# Altium PCB IndAlarmIf1All.PcbDoc (part 2 of 2)
Units mil, origin at the board's own origin, x right, y up, seen from the top; angles counter-clockwise.
Board outline 6985 x 3980 mil, 2 copper layers (Top Layer, Bottom Layer); 123 components, 78 nets, 575 pads, 160 vias.
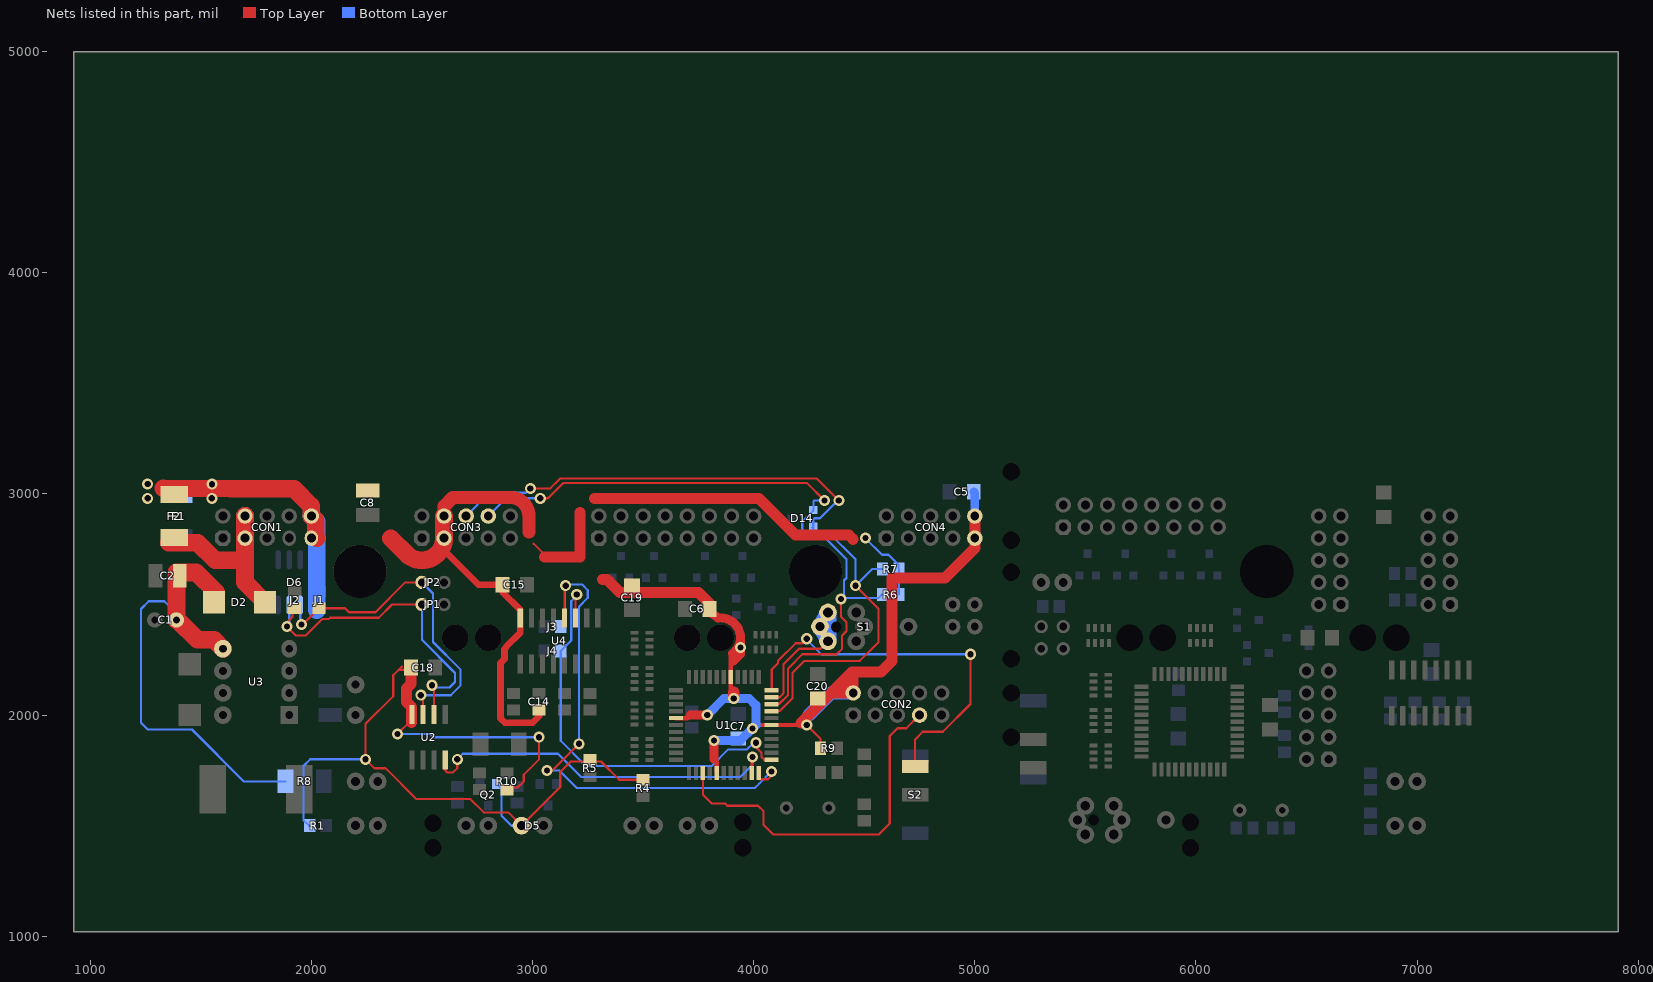
[diagram p2: the nets of this part, all layers, seen from the top]

## Via types
v1: diameter 50, hole 28, Top Layer to Bottom Layer, 160 vias

## Nets (pads, with @x,y where several pads share a name; then routed paths per layer and width w, separated by ;. In a path a pad name is that pad's centre, name@x,y a point inside that pad or via, vN(x,y) a via of type N, cw(c..) or ccw(c..) an arc to the next point about the centre after c; other vN are vias at no path point) (continued)
RXD2: J3.2 U1.11 U4.12 | length 2528.4
  Top Layer w10: v1(3065,1750) 3090,1750 v1(3210,1870) ; U4.12@3145,2443.35 v1@3145,2580 ; U1.11@4022.48,1738.46 4022.48,1717.52 4030,1710 4065,1710 4080,1725 v1(4080,1745)
  Bottom Layer w10: v1(3065,1750) 3120,1750 3200,1670 4005,1670 4025,1690 v1(4080,1745) ; J3.2@3147.4,2400 3147.4,2582.4 v1(3150,2585) 3155,2590 3225,2590 3250,2565 3250,2530 3210,2490 v1(3210,1870)
S1: S1.0 S1.1 U1.21 | length 981.6
  Top Layer w10: U1.21@4081.54,2080.98 4117.7,2080.98 4135,2098.28 4135,2230 4205,2300 4302,2300 S1.1@4336,2334
  Bottom Layer w10: S1.1@4335,2335 S1.1@4336,2334
  Bottom Layer w20: S1.1@4280,2385 S1.1@4320,2315 ; S1.1@4280,2415 S1.1@4316,2478.92 ; S1.1@4336,2334 S1.1@4336,2463.92 ; S1.1@4350,2334 S1.1@4350,2463.92 ; S1.1@4365,2339 S1.1@4365,2468.92
S2: S2.2 U1.22 | length 1751
  Top Layer w10: U1.22@4081.54,2112.48 4081.54,2206.54 4110,2235 4110,2245 4190,2325 4220,2325 v1(4240,2345) ; S2.2@4730,1767.95 4730,1890 4765,1925 4855,1925 4980,2050 v1(4980,2275)
  Bottom Layer w10: v1(4240,2345) 4240,2340 4305,2275 v1(4980,2275)
SCK: CON2.7 U1.3 | length 1644
  Top Layer w10: U1.3@3770.51,1738.46 3770.51,1704.49 3770.51,1697.77 3770.51,1639.49 3810,1600 3870,1600 3880,1590 4020,1590 4045,1565 4045,1503.28 4088.28,1460 4565,1460 4615,1510 4615,1905 4650,1940 4690,1940 CON2.7@4750,2000
SCL: CON3.6 D14.2 R7.1 U1.19 | length 3539.4
  Top Layer w10: v1(2990,3025) 3080,3025 3125,3070 4095,3070 4285,3070 v1(4385,2970) ; U1.19@4081.54,2017.99 4117.99,2017.99 4175,2075 4175,2190 4230,2245 4480,2245 4565,2330 4565,2480 v1(4460,2585)
  Bottom Layer w10: CON3.6@2700,2900 2805,3005 2970,3005 v1(2990,3025) ; D14.2@4265,2848.39 D14.2@4269.21,2852.6 ; D14.2@4269.21,2850.79 D14.2@4269.21,2852.6 ; D14.2@4269.21,2854.21 D14.2@4269.21,2852.6 ; v1@4385,2955 v1(4385,2970) ; v1@4400,2955 v1(4385,2970) ; R7.1@4582.6,2660 4535,2660 v1(4460,2585) 4460,2700 4460,2705 4340,2825 4280,2825 4269.21,2835.79 4269.21,2884.21 4275,2890 4300,2890 4380,2970 v1(4385,2970)
SDA: CON3.8 D14.1 R6.1 U1.20 | length 3219
  Top Layer w10: v1(3035,2980) 3070,2980 3140,3050 4080,3050 4240,3050 v1(4320,2970) ; U1.20@4081.54,2049.49 4115,2050 4155,2090 4155,2210 4220,2275 4375,2275 4400,2300 4400,2360 4420,2380 4420,2420 4395,2445 v1(4395,2525) v1@4391.55,2521.55
  Bottom Layer w10: CON3.8@2800,2900 2880,2980 v1(3035,2980) ; v1(4320,2970) 4275,2970 4270,2965 4270,2928.19 D14.1@4269.21,2927.4 4269.21,2924.21 4220,2875 4220,2825 4245,2800 4325,2800 4420,2705 4420,2620 4408.45,2608.45 4408.45,2538.45 v1(4395,2525) ; v1@4405,2535 v1(4395,2525) ; R6.1@4582.6,2545 4580,2545 4565,2530 4400,2530 v1(4395,2525)
TXD: U1.10 U2.4 | length 1690.9
  Top Layer w10: U2.4@2605,1797.64 2605,1750 2615,1740 2640,1740 2660,1760 v1(2660,1800) ; U1.10@3990.98,1738.46 3990.98,1800.98 v1@4010,1820
  Bottom Layer w10: v1(2660,1800) 2685,1825 3115.36,1825 3220.36,1720 3939.64,1720 3995,1775.36 v1(3995,1810)
TXD2: J4.2 U1.12 U4.11 | length 1911.3
  Top Layer w10: U4.11@3195,2443.35 v1@3195,2540 ; v1@4005,1860 4035,1830 4035,1810 4047.48,1797.52 U1.12@4081.54,1797.52 U1.12@4087.48,1797.52 ; v1@4010,1855 v1(4010,1875)
  Bottom Layer w10: v1(3200,2545) 3200,2540 3175,2515 3175,2337.6 J4.2@3127.4,2290 3127.4,1883.66 3241.07,1770 3810,1770 3885,1845 3970,1845 v1@4000,1875 ; v1@4000,1875 v1(4010,1875) v1@4000,1875
U+: C1.1 C2.2 D2.2 R8.2 U3.5 | length 2246.6
  Top Layer w80: D2.2@1570,2510 1570,2555 1480,2645 1390,2645 C1.1@1390,2430 1395,2430 1485,2340 1560,2340 U3.5@1600,2300
  Bottom Layer w10: C1.1@1390,2430 1390,2460 1335,2515 1265,2515 1230,2480 1230,1965 1260,1935 1460,1935 1695,1700 R8.2@1883.39,1700
UIN: CON1.3 CON1.4 D2.1 F2.1 | length 904.6
  Top Layer w80: F2.1@1355,2780 1487.05,2777.95 1565,2700 1700,2700 ; CON1.4@1700,2900 1700,2600 D2.1@1790,2510
  Bottom Layer w80: CON1.3@1700,2800 CON1.4@1700,2900
VCC: C5.2 C6.2 C7.2 C8.2 C14.1 C15.2 C18.2 C19.2 C20.2 CON1.9 CON1.10 CON2.2 CON3.3 CON3.4 CON4.9 CON4.10 D5.1 D6.1 D6.8 F1.1 F2.2 Q2.2 R1.2 R4.2 R5.2 R6.2 R7.2 R9.1 R10.1 U1.5 U1.17 U1.27 U1.38 U2.8 U4.16 | length 14799
  Top Layer w10: v1(2390,1915) U2.8@2445,1970 ; 2395,2205 C18.2@2455,2205 ; 2408.68,2218.62 2370,2179.94 2370,2085.15 2245,1960.15 v1(2245,1800) 2285,1760 2335,1760 2345,1750 2465,1630 2475,1620 2720,1620 2780,1560 2890,1560 D5.1@2950,1500 3125,1675 3125,1725 3125,1742.57 3172.43,1790 3310,1790 3392.6,1707.4 R4.2@3500,1707.4 ; R10.1@2885,1672.6 2932.6,1672.6 2960,1700 2960,1730 3030,1800 v1(3030,1900) ; 3005,2775 3055,2725 ; v1(4240,1955) 4302.6,1892.4 R9.1@4302.6,1850
  Top Layer w20: C15.2@2864.88,2555.12 C15.2@2864.88,2590 ; U1.38@3648.46,1986.5 3701.5,1986.5 3715,2000 ; 3820,1800 3833.5,1786.5 U1.5@3833.5,1738.46 ; 3896.5,2280 3896.5,2226.5 ; 3910,2105 3896.5,2118.5 U1.27@3896.5,2171.54 3896.5,2226.5 ; 3910,2245 3905,2235 3896.5,2226.5 ; 4040,1955 U1.17@4081.54,1955 v1(4240,1955) 4215,1965
  Top Layer w30: CON3.3@2600,2800 2600,2745 2755,2590 C15.2@2864.88,2590 ; C15.2@2864.88,2555.12 2945,2475 2945,2443.35 2945,2385 2945,2373.09 2879.24,2307.32 2879.24,2303.74 2873.35,2297.84 2873.35,2253.35 2855,2235 2855,1985 2875,1965 3000,1965 3030,1995 C14.1@3030,2022.6
  Top Layer w40: 3715,2000 v1(3790,2000) ; C6.2@3795,2470 3839.48,2439.38 cw(c3850,2350) 3904.87,2278.66 ; 3820,1800 v1(3820,1885) ; 3910,2245 3940,2275 3940,2360
  Top Layer w50: C18.2@2449.88,2215 2449.88,2139.88 2430,2120 2430,2060 2453.19,2036.81 U2.8@2453.19,1966.81 ; 3055,2715 3215,2715 3215,2915 ; 3280,2980 3321.57,2980 4025,2980 4190,2815 4430,2815 4450,2795 ; 3316.6,2612.66 3317.34,2612.66 3337.34,2612.66 ; 3345,2605 3337.34,2612.66 ; C6.2@3800.12,2480 3800.12,2504.88 3750,2555 3730,2555 3395,2555 3337.34,2612.66 ; v1(3910,2075) 3910,2105 ; 4215,1965 4350,2100 ; 4395,2145 4445,2195 4575,2195 4625,2245 4625,2620 4865,2620 5000,2755 CON4.10@5000,2900 ; 4415,2140 4450,2105 CON2.2@4450,2100 ; 4350,2100 4420,2170 4450,2170 CON2.2@4450,2100 ; 4350,2100 CON2.2@4450,2100
  Top Layer w60: 2355,2800 2358.69,2800 ; CON3.4@2600,2900 2600,2945 2638.82,2983.82 2900,2983.82 cw(c2900,2900) 2983.82,2900 2983.82,2829.32
  Top Layer w80: F2.2@1330,3025 1922.95,3022.05 2000,2945 CON1.10@2000,2900 2020,2880 2020,2805 CON1.9@2025,2800 ; 2358.69,2800 2432.17,2726.52 ccw(c2500,2800) CON3.3@2600,2800 CON3.4@2600,2900
  Bottom Layer w10: R1.2@1992.6,1500 1990,1500 1965,1525 1965,1770 1995,1800 v1(2245,1800) ; v1(2390,1915) 2535,1915 2550,1900 v1(3030,1900) ; Q2.2@2849.21,1677.4 Q2.2@2837.4,1689.21 2860,1666.61 2860,1545 2905,1500 D5.1@2950,1500 ; v1(3995,1940) v1@4010,1955 ; v1(4505,2800) 4580,2725 4610,2725 4655,2680 4655,2662.4 R7.2@4657.4,2660 R6.2@4657.4,2545
  Bottom Layer w20: v1@3810,1895 v1(3820,1885) ; v1(3995,1940) 4010,1955 v1(4240,1955)
  Bottom Layer w40: v1(3790,2000) 3865,2075 v1(3910,2075) 3980,2075 4010,2045 v1@4010,1955 ; v1(3820,1885) 3940,1885 v1(3995,1940) ; C5.2@4995.12,3010 5000,3005.12 CON4.9@5000,2800
  Bottom Layer w60: 4250,2000 4350,2100 CON2.2@4450,2100
  Bottom Layer w80: CON1.10@2000,2900 2025,2875 2025,2475
  other v1: 3940,2305 1260,2980 1550,2980 1550.48,3043.89 1260,3045
XA: D6.3 J2.2 JP1.2 U2.6 | length 1579.5
  Top Layer w10: J2.2@1925,2482.6 1915,2472.6 1915,2445 1890,2420 v1(1890,2400) 1930,2360 1975,2360 2050,2435 2080,2435 2085,2440 2305,2440 2365,2500 JP1.2@2500,2500 ; v1(2545,2135) 2555,2125 U2.6@2555,2002.36
  Bottom Layer w10: v1(1890,2400) 1900,2410 D6.3@1900,2497.64 D6.3@1900,2470 ; JP1.2@2500,2500 2500,2360 2500,2340 2650,2190 2650,2150 2625,2125 2555,2125 v1(2545,2135)
XB: D6.2 J1.2 JP2.1 U2.7 | length 1590.1
  Top Layer w10: v1@1955,2400 1955,2402.6 J1.2@2035,2482.6 2152.4,2482.6 2170,2465 2290,2465 2425,2600 JP2.1@2500,2600 ; U2.7@2505,2002.36 v1@2505,2080
  Bottom Layer w10: D6.2@1950,2465 D6.2@1950,2497.64 1950,2405 v1@1955,2400 ; v1(2495,2090) 2630,2090 2675,2135 2675,2205 2550,2330 2550,2360.36 2550,2550 JP2.1@2500,2600
  other v1: 1955,2410
pads on no net: C25.1 C25.2 C26.1 C26.2 C27.1 C27.2 C29.1 C29.2 C30.1 C30.2 C31.1 C31.2 C32.1 C32.2 C33.1 C33.2 C34.1 C34.2 C36.1 C36.2 C37.1 C37.2 C39.1 C39.2 C40.1 C40.2 CON2.3 CON12.1 CON12.2 CON12.3 CON12.4 CON12.5 CON12.6 CON12.7 CON12.8 CON12.9 CON12.10 CON13.1 CON13.2 CON13.3 CON13.4 CON13.5 CON13.6 CON13.7 CON13.8 CON13.9 CON13.10 CON14.1 CON14.2 CON14.3 CON14.4 CON14.5 CON14.6 CON14.7 CON14.8 CON14.9 CON14.10 CON15.1 CON15.2 CON15.3 CON15.4 CON15.5 CON15.6 CON15.7 CON15.8 CON15.9 CON15.10 CON15.11 CON15.12 CON15.13 CON15.14 CON15.15 CON15.16 D23.1 D23.2 D24.1 D24.2 D28.1 D28.2 D30.1 D30.2 D30.3 D31.1 D31.2 D31.3 D32.1 D32.2 D32.3 D33.1 D33.2 D33.3 D34.1 D34.2 D34.3 D35.1 D35.2 D35.3 D36.1 D36.2 D36.3 J13.1 J13.2 J14.1 J14.2 JP13.1 JP13.2 JP14.1 JP14.2 R21.1 R21.2 R24.1 R24.2 R25.1 R25.2 R29.1 R29.2 R33.1 R33.2 R33.3 R33.4 R33.5 R33.6 R33.7 R33.8 R34.1 R34.2 R34.3 R34.4 R34.5 R34.6 R34.7 R34.8 R35.1 R35.2 R35.3 R35.4 R35.5 R35.6 R35.7 R35.8 R36.1 R36.2 R36.3 R36.4 R36.5 R36.6 R36.7 R36.8 R37.1 R37.2 R37.3 R37.4 R37.5 R37.6 R37.7 R37.8 S1.3 S11.0 S11.1 S11.2 S11.3 S12.1 S12.2 S12.3 U4.7 U4.9 U11.1 U11.2 U11.3 U11.4 U11.5 U11.6 U11.7 U11.8 U11.9 U11.10 U11.11 U11.12 U11.13 U11.14 U11.15 U11.16 U11.17 U11.18 U11.19 U11.20 U11.21 U11.22 U11.23 U11.24 U11.25 U11.26 U11.27 U11.28 U11.29 U11.30 U11.31 U11.32 U11.33 U11.34 U11.35 U11.36 U11.37 U11.38 U11.39 U11.40 U11.41 U11.42 U11.43 U11.44 U14.1 U14.2 U14.3 U14.4 U14.5 U14.6 U14.7 U14.8 U14.9 U14.10 U14.11 U14.12 U14.13 U14.14 U14.15 U14.16 Y11.1 Y11.2
copper on no net: | length 73627.4
  Top Layer w10: 5320,1715 v1(5375,1660) 5545,1660 5615.08,1589.92 ; 5320,1715.59 5320,1762.05 ; 5320,1890 5355,1890 5405,1840 5405,1735 5450,1690 5565,1690 5595,1660 v1(5690,1660) ; 5400,2300 5350,2350 5265,2350 5240,2375 5240,2665 5315,2740 5315,3000 5360,3045 6530,3045 v1(6575,3000) ; 5400,2400 5460,2460 5460,2625 5340,2745 5340,2980 5380,3020 6480,3020 v1(6500,3000) ; 5400,2850 5400,2755 v1(5460,2695) ; 5400,2950 5500,2950 ; v1(5450,1775) 5505.75,1830.75 5536.53,1830.75 ; v1(5450,1840) 5470,1840 5492.24,1862.24 5536.54,1862.24 ; 5450,2950 5450,2785 5510,2725 5510,2660 5585,2585 5965,2585 v1(6025,2525) ; v1(5485,1910) 5502.76,1927.76 5536.53,1927.76 ; v1(5495,1730) 5495,1780 5514.25,1799.25 5536.53,1799.25 ; v1(5495,2055) 5536.54,2055 ; 5500,2850 5500,2800 5560,2740 v1(5560,2695) ; 5512.76,2326.54 5512.76,2307.24 5605,2215 5784.06,2215 5812.52,2186.54 ; 5512.76,2393.47 5512.76,2422.76 5585,2495 5705,2495 v1(5725,2515) ; v1(5530,2230) 5505,2205 5505,2195 5517.76,2182.24 5536.53,2182.24 ; 5535.79,2120 v1(5465,2120) 5450,2105 5450,2040 5499.25,1990.75 5536.53,1990.75 ; 5536.53,1959.25 5470.75,1959.25 v1(5450,1980) 5420,2010 5420,2140 5445,2165 5485,2165 5499,2151 5537,2151 ; 5536.54,2022.24 5536.54,2087.76 ; 5542.24,1767.76 5536.53,1767.76 5552.24,1767.76 v1(5605,1715) ; 5544.25,2326.53 5544.25,2305.75 5615,2235 5835,2235 5844.02,2225.98 5844.02,2186.54 ; 5544.25,2393.47 5544.25,2419.25 5595,2470 5770,2470 v1(5790,2490) ; 5575.75,2326.53 5575.75,2309.25 5630,2255 5855,2255 5875.51,2234.49 5875.51,2186.54 ; 5576,2393 5576,2411 5615,2450 5835,2450 v1(5855,2470) ; 5600,2820 5600,2850 5700,2850 ; 5600,2950 5550,2900 5550,2810 5630,2730 v1(5630,2695) v1@5630,2715 ; 5603,1959 5603,1928.22 5604.78,1930 ; 5603.47,1830.75 5603.47,1862.24 5616.22,1875 5752.95,1875 5753.46,1875.51 ; 5603.47,1927.76 5622.24,1927.76 5642.99,1907.01 5753.46,1907.01 ; 5603.47,2022.24 5603.47,1990.75 5604.21,1990 5625,1990 5676.5,1938.5 5753.46,1938.5 ; 5603.46,2087.76 5662.24,2087.76 5717.01,2032.99 5753.46,2032.99 ; 5603.47,2119.25 5660.75,2119.25 5715.51,2064.49 5753.46,2064.49 ; 5603.47,2150.75 5659.25,2150.75 5714.02,2095.98 5753.46,2095.98 ; 5603.47,2182.24 5698.7,2182.24 5753.46,2127.48 ; 5607.24,2326.53 5613.47,2326.53 5665,2275 5865,2275 5907.01,2232.99 5907.01,2186.54 ; 5607.24,2393.47 5608.47,2393.47 5645,2430 v1(5910,2430) ; 5639,1526 5731,1526 5787.68,1582.68 5787.68,1744.73 5772.4,1760 v1(5765,1760) ; 5650,2850 5650,2765 5680,2735 5685,2735 5685,2675 5745,2615 6010,2615 v1(6235,2390) ; 5700,2950 5750,2900 5750,2765 5735,2750 v1(5735,2695) v1@5735,2715 ; v1(5735,1595) 5735,1715 5700,1750 5700,1795 5717.52,1812.52 5753.46,1812.52 ; 5753.46,1844.02 5679.02,1844.02 5635,1800 5604.93,1800 ; 5800,2850 5800,2735 v1(5840,2695) ; 5800,2950 5900,2950 ; 5812.52,1753.46 5812.52,1692.48 5925,1580 6025,1580 6050,1555 6050,1535 6130,1455 6590,1455 6650,1515 v1(6650,1530) ; 5844.02,1753.46 5844.02,1690.98 5935,1600 6035,1600 6070,1565 6070,1550 6140,1480 v1@6550,1480 ; 5850,2950 5850,2775 5890,2735 5890,2680 5925,2645 6040,2645 6280,2405 v1(6280,2315) ; 5875.51,1753.46 5875.51,1689.49 5945,1620 6050,1620 6090,1580 6090,1565 6150,1505 6480,1505 v1(6510,1535) ; 5900,2850 5900,2800 5945,2755 v1(5945,2695) ; 5907.01,1753.46 5907.01,1687.99 5955,1640 6065,1640 6115,1590 6115,1580 6170,1525 6420,1525 6440,1545 6440,1590 6390,1640 6355,1640 6255,1640 v1(6180,1715) ; 5938.5,2186.54 5938.5,2228.5 v1(5965,2255) ; 5972.76,2326.53 5972.76,2307.24 6032.99,2247.01 6032.99,2227.01 6032.99,2186.54 ; 5972.76,2393.47 5972.76,2467.76 v1(5975,2470) ; 6000,2850 6100,2850 ; 6000,2950 5950,2900 5950,2805 6010,2745 v1(6010,2695) ; 6001.5,1753.46 6001.5,1718.5 6040,1680 6087.87,1680 6197.87,1570 ; 6004,2327 6004,2306 6064.49,2245.51 6064.49,2225.51 6064.49,2186.54 ; 6004.25,2393.47 6004.25,2424.25 6030,2450 6095,2450 v1(6135,2410) ; 6032.99,1753.46 6032.99,1722.01 6050,1705 6100,1705 6170,1635 6205,1635 6270,1570 6390,1570 ; 6035.75,2326.53 6035.75,2309.25 6095.98,2249.02 6095.98,2224.02 6095.98,2186.54 ; 6035.75,2393.47 6035.75,2420.75 6045,2430 6085,2430 6095,2420 6095,2390 6170,2315 v1(6175,2315) v1@6155,2315 ; 6050,2850 6050,2760 6065,2745 6065,2655 6330,2390 6330,2275 v1(6280,2225) ; 6067.24,2326.53 6127.48,2266.3 6127.48,2222.52 6127.48,2186.54 ; 6067.24,2393.46 6067.24,2377.76 6125,2320 6125,2305 v1(6175,2255) ; 6100,2950 6150,2900 6150,2805 6115,2770 v1(6115,2695) v1@6115,2700 ; v1@6112.99,2032.99 6186.53,2032.99 ; 6127.48,1753.46 6133.46,1753.46 6150,1770 6225,1770 6235,1760 6275,1760 6295,1740 6365,1740 6505,1600 6750,1600 6815,1665 6815,1775 6790,1800 6790,1915 6810,1935 v1(6810,2065) ; 6186.54,1812.52 6222.48,1812.52 6255,1780 6286.72,1780 6301.72,1765 6375,1765 6515,1625 6740,1625 6790,1675 6790,1765 6770,1785 6770,2095 6785,2110 6830,2110 6875,2065 6930,2065 6940,2055 7035,2055 7135,2155 7135,2203.35 7135,2250 7155,2270 7215,2270 7250,2305 7250,2350 v1(7200,2400) ; 6186.54,1844.02 6220.98,1844.02 6265,1800 6295,1800 6305,1790 6385,1790 6525,1650 6730,1650 6765,1685 6765,1750 6750,1765 6750,2105 6790,2145 v1(6790,2210) ; 6186.54,1875.51 6219.49,1875.51 6275,1820 6305,1820 6315,1810 6395,1810 6535,1670 6720,1670 6745,1695 6745,1740 6730,1755 6730,2145 v1(6745,2160) ; 6186.54,1938.5 6221.5,1938.5 6305,1855 v1(6330,1855) ; 6186.53,2064.49 6229.49,2064.49 6340,2175 v1(6365,2175) ; 6186.53,2095.99 6225.98,2095.99 6235,2105 v1@6235,2175 ; 6190,2125 6210,2145 6210,2155.64 v1@6195.64,2170 ; v1@6265,1715 6355,1715 6495,1575 6875,1575 6915,1575 7000,1660 7000,1700 ; v1@6555,1485 v1(6565,1495) ; 6610.12,2344.88 6610.12,2350 ; v1@6825,2155 6885,2095 6945,2095 6960,2080 7015,2080 7085,2150 7085,2203.35 7085,2240 7145,2300 7170,2300 v1(7200,2330) ; v1(6835,1875) 6835,1905 6885,1955 6885,1996.65 ; v1(6875,1820) 6875,1900 6935,1960 6935,1996.65 ; 6885,2203.35 6885,2235 ; v1(6920,1875) 6920,1900 6985,1965 6985,1996.65 ; v1(6960,1820) 6960,1900 6980,1920 7010,1920 7035,1945 7035,1996.65 ; 6985,2203.35 6985,2250 7030,2295 7060,2295 7115,2350 7115,2390 7065,2440 7030,2440 6995,2475 6995,2525 7020,2550 7100,2550 7150,2500 ; v1(7005,1875) 7085,1955 7085,1996.65 ; 7035,2203.35 7035,2250 7055,2270 7075,2270 7150,2345 7150,2400 7100,2450 7050,2500 ; 7050,2600 7050,2700 ; 7135,1996.65 7135,1945 7110,1920 7085,1920 7060,1895 7060,1840 ; 7150,2600 7150,2700 ; 7185,2203.35 7185,2125.12 v1(7189.16,2120.95) 7235,2075.12 7235,1996.65 ; 5603.47,1798.54 5603.47,1767.76 5603.47,1798.54 ; 5603.47,1798.54 5604.93,1800 ; 5603.47,1798.54 5604.93,1800 ; 7060,1840 v1(7040,1820) 7060,1840
  Top Layer w20: 5753.47,2001.49 5801.49,2001.49 v1(5820,2020) ; v1(5920,1820) 5938.5,1801.5 5938.5,1753.46 ; v1(5970,1685) 5970,1753.46 ; 6001.49,2186.53 6001.49,2133.51 v1(6015,2120) ; v1(6120,1950) 6140,1970 6186.53,1970 6230,1970 ; 6325,1915 6285,1915 6255,1945 6245,1955 6230,1970 ; 6360,1960 6350,1970 6230,1970
  Top Layer w30: 6485,2075 6490,2080 6490,2095 6495,2100 ; 6494.88,2045.12 6500,2040 6500,2015 ; 6690,2265 6855,2265 6885,2235 6885,2170 6885,2160 6920,2125 6985,2125 v1(6990,2120) ; 6935,2170 6935,2255 6990,2310 6990,2320 v1@7040,2370 ; 7050,2800 7030,2800 6950,2720 6950,2460 v1@7040,2370 ; v1(7065,2370) v1@7040,2370
  Top Layer w50: v1(6270,1950) 6330,1950 6565,1715 6630,1715 6680,1765 6680,2275 6610.12,2344.88 ; 6610,2340 6730,2460 6730,2535 6730,2776.12 6849.38,2895.5 ; 6665,1750 v1(6700,1715) ; 6665,2600 6730,2600
  Top Layer w60: 6500,1900 6500,2500 ; 6555,2600 6730,2600 ; 6555,2900 6520,2900 6475,2855 6475,2525 6500,2500 ; 6655,2500 6500,2500 ; 6849.38,2895.5 6853.88,2900 7150,2900
  Top Layer w70: 6555,2900 6655,2900 ; 6655,2700 6655,2900 ; 7050,2800 7150,2800 ccw(c7150,2900) 7150,3000 6755,3000 6655,2900
  Bottom Layer w10: 5300,2600 5300,2985 5395,3080 6390,3080 6410,3060 6460,3060 ; 5305,2079.41 5320,2064.41 5320,2280 5300,2300 5300,2400 5382.4,2482.4 5382.4,2490 ; 5307.6,2490 5307.6,2507.6 5400,2600 ; 5320,1715.59 v1@5375,1660.59 ; v1(5450,1775) 5475,1800 5560,1800 5605,1845 5605,2115 5655,2165 5655,2250 5605,2300 5605,2410 5650,2455 5755,2455 v1(5790,2490) ; v1(5450,1840) 5535,1840 5580,1885 5580,2125 5630,2175 5630,2245 5580,2295 5580,2420 5650,2490 5700,2490 v1(5725,2515) 5780,2570 5830,2570 5852.6,2592.6 5852.6,2630.79 ; v1(5450,1980) 5485,1980 5535,2030 5535,2115 5490,2160 5490,2250 5505,2265 5505,2425 5642.6,2562.6 5642.6,2602.6 5642.6,2630.79 5642.6,2682.4 v1(5630,2695) ; v1(5460,2695) 5472.6,2682.4 5472.6,2630.79 5472.6,2602.4 5500,2575 5500,2500 5455,2455 5455,2290 5440,2275 5440,2160 5420,2140 5420,2085 5450,2055 v1(5495,2055) ; v1(5465,2120) 5465,2265 5480,2280 5480,2440 5547.4,2507.4 5547.4,2602.4 5547.4,2630.79 5547.4,2682.4 v1(5560,2695) ; v1(5485,1910) 5555,1980 5555,2205 v1(5530,2230) 5530,2415 5655,2540 5670,2540 5717.4,2587.4 5717.4,2630.79 ; v1(5495,1730) 5525,1760 5580,1760 5630,1810 5630,2105 5680,2155 5680,2260 5625,2315 5625,2395 5660,2430 5780,2430 5800,2450 5835,2450 v1(5855,2470) 5980,2595 6010,2595 6022.6,2607.6 6022.6,2630.79 6022.6,2682.4 v1(6010,2695) ; 5500,1589.92 5575,1660 5615.08,1660 5680,1724.92 5680,2085 5780,2185 5795,2185 5945,2335 6030,2335 6150,2215 6185,2215 6190,2210 6210,2210 v1(6245,2175) ; 5510,2729.21 5510,2735 5520,2745 6155,2745 6170,2730 6170,2585 6200,2555 6215,2555 6270,2500 6555,2500 ; v1(5605,1715) 5655,1765 5655,2095 5775,2215 5775,2390 5815,2430 v1(5910,2430) 5910,2480 6000,2570 6075,2570 6097.4,2592.4 6097.4,2630.79 ; v1(5690,1660) 5705,1675 5705,2075 5785,2155 5800,2155 5955,2310 6020,2310 v1@6160,2170 ; 5705.79,2630.79 5717.4,2630.79 ; v1(5735,1595) 5755,1615 6005,1615 6095,1525 6095,1485 6145,1435 6545,1435 6555,1425 6700,1425 6710,1435 6935,1435 7000,1500 ; v1(5735,2695) 5717.4,2677.4 5717.4,2630.79 ; v1@5790,2500 v1(5790,2490) ; v1(5840,2695) 5852.6,2682.4 5852.6,2630.79 ; 5840.79,2630.79 5852.6,2630.79 ; 5920,2187.4 5920,2240 5935,2255 v1(5965,2255) ; 5920.79,2630.79 5927.4,2630.79 ; v1(5945,2695) 5927.4,2677.4 5927.4,2630.79 ; v1(5975,2470) 6183.19,2470 6185,2471.81 ; v1(6025,2525) 6045,2505 6215,2505 6230,2490 6230,2480 6217.4,2467.4 6185.79,2467.4 ; 6080.79,2630.79 6097.4,2630.79 ; 6085.79,2630.79 6097.4,2630.79 ; v1@6110,2030 6085,2030 6055,2060 6055,2130 6075,2150 6135,2150 6135.28,2149.72 6145,2140 6148.54,2140 6163.54,2125 6255,2125 6350,2220 6380,2220 6470,2310 6470,2335 6509.21,2374.21 6509.21,2387.4 ; v1(6115,2695) 6097.4,2677.4 6097.4,2630.79 ; v1(6135,2410) 6155,2390 v1(6235,2390) ; v1(6175,2255) 6197.4,2232.6 6225.79,2232.6 6233.39,2225 v1(6280,2225) ; v1(6175,2315) v1(6280,2315) ; v1(6180,1715) 6190,1835 6247.4,1897.4 6370,1897.4 6380,1907.4 6400,1907.4 ; 6182.6,1490 6182.6,1554.72 6197.87,1570 ; v1(6245,1715) 6245,1820 6280,1855 v1(6330,1855) ; 6330.79,2270 6410.79,2350 6364.21,2350 6284.21,2430 6430,2430 6500,2500 ; v1(6365,2175) 6380,2175 6509.21,2304.21 6509.21,2312.6 ; 6372.4,1907.4 6400,1907.4 ; 6390,1570 6422.4,1537.6 6422.4,1490 ; 6400,1832.6 6432.6,1800 6500,1800 ; 6400,2012.6 6400,1907.4 ; 6407.4,1900 6400,1907.4 ; v1@6500,1540 6580,1540 6645,1475 6670,1475 6700,1505 6700,1550 6625,1625 6625,1740 6655,1770 6655,2045 6600,2100 ; v1(6500,3000) 6540,2960 6610,2960 6625,2975 6665,2975 6760,2880 6760,2470 6830,2400 6830,2315 6790,2275 6770,2275 6745,2250 v1(6745,2160) ; 6507.4,2387.4 6509.21,2387.4 ; 6509.21,2314.21 6509.21,2312.6 ; 6509.21,2389.21 6509.21,2387.4 ; 6555,2700 6605,2650 6685,2650 6710,2625 6710,2470 6680,2440 6585,2440 6573.19,2428.19 6550,2428.19 6509.21,2387.4 ; 6555,2800 6605,2750 6685,2750 6735,2700 6735,2465 6685,2415 6650,2415 6600,2415 6560,2375 6522.91,2337.91 6522.91,2326.3 6509.21,2312.6 ; v1(6565,1495) 6610,1450 6680,1450 6730,1500 6730,1560 6650,1640 6650,1730 6680,1760 6680,2120 6600,2200 ; v1(6575,3000) 6680,3000 6785,2895 6785,2485 6845,2425 6940,2425 6980,2385 6980,2315 6940,2275 6855,2275 v1(6790,2210) ; 6600,1800 6600,1570 v1@6635,1535 ; 6600,2000 6550,1950 6550,1860 6540,1850 6465,1850 6407.6,1907.4 6400,1907.4 ; v1(6700,1715) 6750,1665 6787.6,1665 6790,1662.6 6790,1557.4 ; 6790,1482.6 6882.6,1482.6 6900,1500 ; 6790,1737.4 6862.6,1737.4 6900,1700 6905,1700 ; v1(6810,2065) 6810,2130 v1(6835,2155) ; v1(6835,1875) 6835,1937.6 6880,1982.6 ; 6857.4,2057.4 6880,2057.4 6872.4,2057.4 6830,2015 6830,1970 6790,1930 6790,1850 6830,1810 6830,1795 6850,1775 6900,1775 6920,1795 v1(6920,1875) ; v1(6875,1820) 6875,1900 6957.6,1982.6 6990,1982.6 ; 6897.6,2520 6897.6,2512.4 6940,2470 7000,2470 7030,2440 7070,2440 7180,2330 v1(7200,2330) ; 6897.6,2640 6897.6,2622.4 6940,2580 6990,2580 7020,2550 7100,2550 7150,2500 ; v1(6960,1820) 6960,1900 6985,1925 7020,1925 7050,1955 7050,2020 7087.4,2057.4 7100,2057.4 ; 6972.4,2520 7030,2520 7050,2500 ; 6972.4,2640 6975,2640 6985,2650 7190,2650 7210,2630 7210,2410 v1(7200,2400) ; 6990,2057.4 v1(6990,2120) ; v1(7005,1875) 7100,1970 7100,1982.6 ; v1(7040,1820) 7040,1845 7060,1865 7060,1895 7085,1920 7115,1920 7177.6,1982.6 7210,1982.6 ; 7054.88,2184.88 7065,2184.88 ; 7065,2295.12 7065.12,2295 7105,2295 7189.16,2210.84 v1(7189.16,2120.95) 7210,2100.12 7210,2057.4 ; v1(5790,2490) 5830,2530 5865,2530 5927.4,2592.4 5927.4,2630.79
  Bottom Layer w20: 5320,1715.59 5320,2064.41 ; 5500,1460 5500,1589.92 ; 5515,1480 5515,1569.92
  Bottom Layer w30: v1(6990,2120) 7054.88,2184.88 ; 7065,2295.12 v1(7065,2370)
  Bottom Layer w40: v1(5970,1685) 6100,1685
  Bottom Layer w50: v1(5375,1660) v1@5375,1660.59 ; v1(5765,1760) 5800,1795 ; 5920,2005.12 5920,2112.6 ; 5920,2100 v1(5840,2100) 5790,2100 5750,2060 5750,1855 5850,1755 5850,1685 v1(5970,1685) ; 6095,1685 6125,1655 6210,1655 6305,1560 6305,1490 ; 6100,1685 v1(6100,1855) ; v1(6100,2100) 6130,2100 6165,2065 6325,2065 6347.4,2087.4 6400,2087.4 6497.6,2087.4 ; 6257.4,1490 6347.6,1490 ; 6324.21,2270 6330.79,2270 ; 6555,2600 6535,2600 6475,2660 6475,2745 6415,2805 6415,3020 6455,3060 6890,3060 7050,2900 7150,2900
  Bottom Layer w60: 6500,1900 6500,2200 ; 6555,2600 6655,2600
  Bottom Layer w70: 6500,2500 6655,2500
  Bottom Layer w80: 5627.95,1460 5627.95,1589.92
  other v1: 6095,2040 6180,2170

## Polygon pours and split planes (outlines as drawn)
GND on Top Layer (hatched 45Degree grid 8 track 10, remove dead copper): 2200,2137.8 2200,2180 2002.33,2377.67 2059.65,2435 2878.38,2435 2878.38,1625 2465,1625 2330,1760 2230,1760 2230,1955 2215,1970 2190,1995
VCC on Top Layer (hatched 45Degree grid 8 track 10, remove dead copper): 2480,2180 2480,2320 2515,2355 2887.4,2355 2887.4,2613.57 2360,2613.57 2360,2245 2425,2180
VCC on Top Layer (hatched 45Degree grid 8 track 10, remove dead copper): 3865,2040 3865,2300.6 3665.6,2500 3145,2500 3145,2802.97 3330,2802.97 3532.97,2600 3825,2600 4000,2425 4000,2040
GND on Top Layer (hatched 45Degree grid 8 track 10, remove dead copper): 2985,2680 3195,2680 3365,2510 3735,2510 3820,2425 3860,2385 3885,2360 3885,2095 3600,2095 3600,2340.75 3525.75,2415 3210,2415 3100,2525 2975.12,2525
GND on Top Layer (hatched 45Degree grid 8 track 10, remove dead copper): 3010,2345 3235,2120 3235,2000 3430,2000 3430,2468.42 2995,2468.42
VCC on Top Layer (hatched 45Degree grid 8 track 10, remove dead copper): 2606.97,2651.97 2875,2383.95 2868.95,2390 2863.95,2395 2863.95,2250 2895,2250 2895,2315 2985,2405 2985,2755.33 2631.86,2755.33
GND on Top Layer (hatched 45Degree grid 8 track 10, remove dead copper): 2700,2800 2935,2565 2935,2535 2985,2485 2985,2395 3055,2395 3055,2778.58 3027.58,2806
VCC on Top Layer (hatched 45Degree grid 8 track 10, remove dead copper): 1210,3090 1210,2940 1860,2940 1860,2420 2375,2420 2695,2740 2915,2740 2960,2695 3208.58,2695 3268.58,2755 3268.58,2925 4025,2925 4185,2765 4440,2765 4615,2590 5140,2590 5140,3090
VCC on Top Layer (hatched 90Degree grid 5 track 10, remove dead copper): 3960,1970 4185,1970 4260,2045 4260,2100 4290,2130 4355,2195 4440,2195 4440,2065 4355,2065 4230,1940 4210,1920 3955,1920
GND on Top Layer (hatched 90Degree grid 5 track 10, remove dead copper): 3680,2140 4050,2140 4050,1770 3680,1770
VCC on Top Layer (hatched 90Degree grid 5 track 10, remove dead copper): 3794,2039.8 3620,2039.8 3620,1965 3795,1965
GND on Top Layer (hatched 90Degree grid 5 track 10, remove dead copper): 4325,2185 4235,2095 4235,2045 4165,1975 4000,1975 4000,2025 4127.08,2025 4175,2072.92 4175,2150 4235,2210 4270,2210
GND on Top Layer (hatched 45Degree grid 8 track 10, remove dead copper): 4580,1795 4350,1795 4315,1760 4302.6,1747.6 4302.6,1535 4192.87,1535 3920,1807.87 3775,1807.87 3775,1410 4590,1410
NetD1_2 on Top Layer (hatched 45Degree grid 8 track 10, remove dead copper): 1635,1900 1635,1550 1460,1550 1460,1910 1385,1910 1385,2050 1470,2135 1600,2135 1515,2050 1515,1950
GND on Top Layer (hatched 45Degree grid 8 track 10, remove dead copper): 1210,2935 1730,2935 1730,2605 2197.2,2137.8 2197.2,1410 1205,1410
no net on Top Layer (hatched 45Degree grid 8 track 10, remove dead copper): 5785,2155 5700,2155 5700,1705 5875.51,1705 5940.51,1640 6215,1640 6215,1970 6500,1970 6500,2310 6235,2045 6215,2045 6215,2175 5790,2175
GND on Bottom Layer (hatched 45Degree grid 8 track 10): 2839.74,2126.97 2890,2177.24 2890,2265 3127.4,2265 3127.4,1850 2825,1850
GND on Bottom Layer (hatched 45Degree grid 8 track 10, remove dead copper): 1765,3075 1765,2510 1900,2375 2060,2375 2060,1980 2075,1980 2075,1415 2845,1415 2845,2345 3020,2520 3375,2520 3465,2430 3555,2430 3625,2360 4135,2360 4315,2540 5140,2540 5140,3090
VCC on Bottom Layer (hatched 45Degree grid 8 track 10, remove dead copper): 1210,3090 1210,2945 1735,2945 1735,3090
NetC3_2 on Bottom Layer (hatched 45Degree grid 8 track 10, remove dead copper): 1340,2840 1340,2755 1375,2720 1475,2720 1460,2735 1460,2840
GND on Bottom Layer (hatched 45Degree grid 8 track 10, remove dead copper): 1220,2920 1735,2920 1735,2435 1795,2435 1890,2340 2025,2340 2025,2140 2045,2140 2045,1410 1205,1410
GND on Bottom Layer (hatched 90Degree grid 5 track 10, remove dead copper): 3606.91,2391.91 3606.91,2210 3646.91,2170 4120,2170 4235,2055 4310,2130 4420,2130 4500,2050 4605,2050 4605,2275 4305,2275 4205,2375 4195,2385 4190,2390
VCC on Bottom Layer (hatched 90Degree grid 5 track 10, remove dead copper): 4500,2175 4500,1735 3600,1735 3600,2205
no net on Bottom Layer (hatched 90Degree grid 5 track 10, remove dead copper): 5210,3090 6420,3090 6420,2792.35 6555,2657.35 6555,1415 5810,1415 5810,1615 5710,1615 5665,1660 5425,1660 5395,1630 5205,1630
no net on Bottom Layer (hatched 45Degree grid 8 track 10, remove dead copper): 6525,2240 6525,1875 6480,1875 6305,2050 6075,2050 6075,2150 6280,2150 6315,2185 6356.62,2226.62 6365,2226.62 6373.38,2235 6525,2235
no net on Bottom Layer (hatched 45Degree grid 8 track 10, remove dead copper): 5785,2155 5785,1790 6155,1790 6262.4,1897.4 6345,1897.4 6345,2025 6250,2025 6125,2150 6120,2150

## Keep-outs
Keep-Out Layer:
  lines w10: 1200,1900 1405,1900 1405,1400 2600,1400 3130,1400 3130,1620 3370,1620 3370,1400 4000,1400 4800,1400 4800,1900 5200,1900 5200,1620 5400,1620 5400,1400 6020,1400 6400,1400 6500,1400 7100,1400 7100,1900 7300,1900 7300,3100 5200,3100 1200,3100 1200,1900

## Other copper
Top Layer:
  rectangle net UIN: 1825,2460 1865,2560

## Silkscreen, mask and mechanical layers (free items; w line width, h text height)
Top Overlay:
  text "IndAlarmIf1" at 4465,2665 h60
  text "(C) Indasoft bt." at 5434.88,2620 h40
  text "V1.0 2011.05.31." at 4495,2570 h40
  text "IndAlarmIf1s" at 5445,2545 h40
  text "V1.0" at 6065,2505 h40
  text "2011.05.31." at 5410,2430 h40
  text "Indasoft bt." at 1993.81,2287.96 h60
Bottom Overlay:
  rectangle: 3725,2200 3825,2500
  rectangle: 2675,2200 2775,2500
  rectangle: 1650,2200 1750,2500
  rectangle: 4750,2200 4850,2500
  rectangle: 6780,2200 6880,2500
  rectangle: 5725,2200 5825,2500
Mechanical 1:
  lines w80: 2550,1400 2550,1510 ; 3950,1400 3950,1510 ; 5165,1900 5165,2100 ; 5165,2255 5165,2645 ; 5165,2790 5165,3100 ; 5975,1400 5975,1510
  text "Mechanical1=" at 4865,1555 h40
  text "2mm-es maras" at 4855,1465 h40

## Text inside footprints (layer, text, board x,y; h text height)
C1: Top Overlay "+" at 1410,2521 h60 r180
C4: Top Overlay "+" at 2290,1950 h60 r90
CON1: Top Overlay "10" at 2060,2880 h50; Top Overlay "9" at 2060,2780 h50; Top Overlay "1" at 1520,2780 h50; Top Overlay "2" at 1500,2880 h50
CON2: Top Overlay "2" at 4350,2080 h50; Top Overlay "1" at 4370,1980 h50; Top Overlay "9" at 4910,1980 h50; Top Overlay "10" at 4910,2080 h50
CON3: Top Overlay "2" at 2400,2880 h50; Top Overlay "1" at 2420,2780 h50; Top Overlay "9" at 2960,2780 h50; Top Overlay "10" at 2960,2880 h50
CON4: Top Overlay "2" at 4500,2880 h50; Top Overlay "1" at 4520,2780 h50; Top Overlay "9" at 5060,2780 h50; Top Overlay "10" at 5060,2880 h50
CON5: Top Overlay "2" at 3200,2880 h50; Top Overlay "1" at 3200,2780 h50; Top Overlay "15" at 4060,2780 h50; Top Overlay "16" at 4060,2880 h50
CON12: Top Overlay "1" at 6620,1720 h50 r90; Top Overlay "2" at 6520,1700 h50 r90
CON13: Top Overlay "10" at 6575,2960 h50 r90; Top Overlay "9" at 6675,2960 h50 r90; Top Overlay "1" at 6675,2420 h50 r90
CON14: Top Overlay "10" at 7070,2960 h50 r90; Top Overlay "9" at 7170,2960 h50 r90; Top Overlay "1" at 7170,2420 h50 r90; Top Overlay "2" at 7070,2400 h50 r90
CON15: Top Overlay "2" at 5300,2930 h50; Top Overlay "1" at 5300,2830 h50; Top Overlay "15" at 6160,2830 h50; Top Overlay "16" at 6160,2930 h50
D3: Top Overlay "+" at 3430,1425 h40
D4: Top Overlay "+" at 3680,1425 h40
D5: Top Overlay "+" at 2930,1425 h40
D7: Top Overlay "+" at 2180,1625 h40
D8: Top Overlay "+" at 2180,1425 h40
D9: Top Overlay "+" at 2680,1425 h40
D23: Top Overlay "+" at 6880,1625 h40
D24: Top Overlay "+" at 6880,1425 h40
D28: Top Overlay "+" at 5280,2525 h40